# Altium PCB Flight_Controller - Final.PcbDoc
Units mil, origin at the board's own origin, x right, y up, seen from the top; angles counter-clockwise.
Board outline 3850 x 3210 mil, 2 copper layers (Top Layer, Bottom Layer); 58 components, 83 nets, 279 pads, 73 vias.
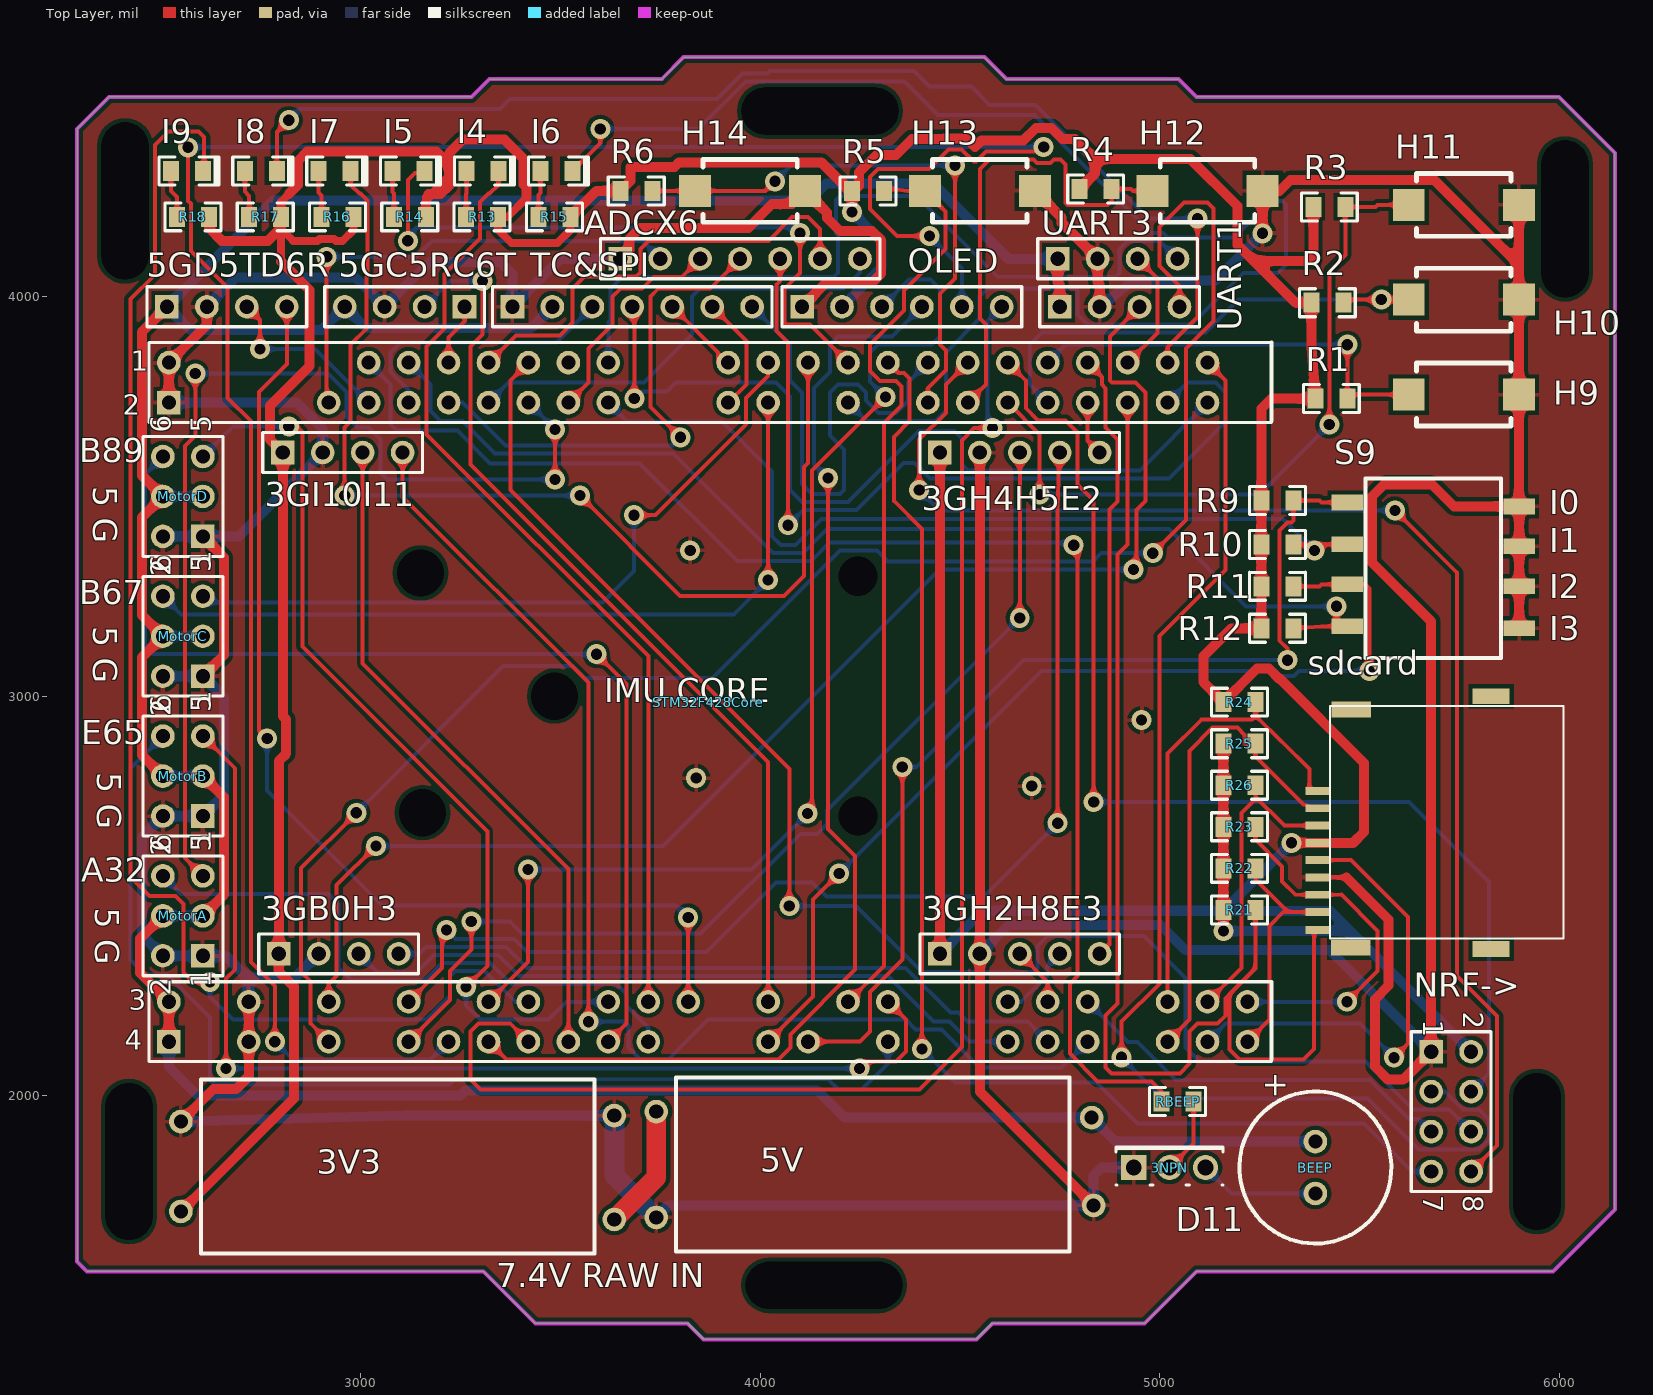
[diagram p0: Top Layer view]
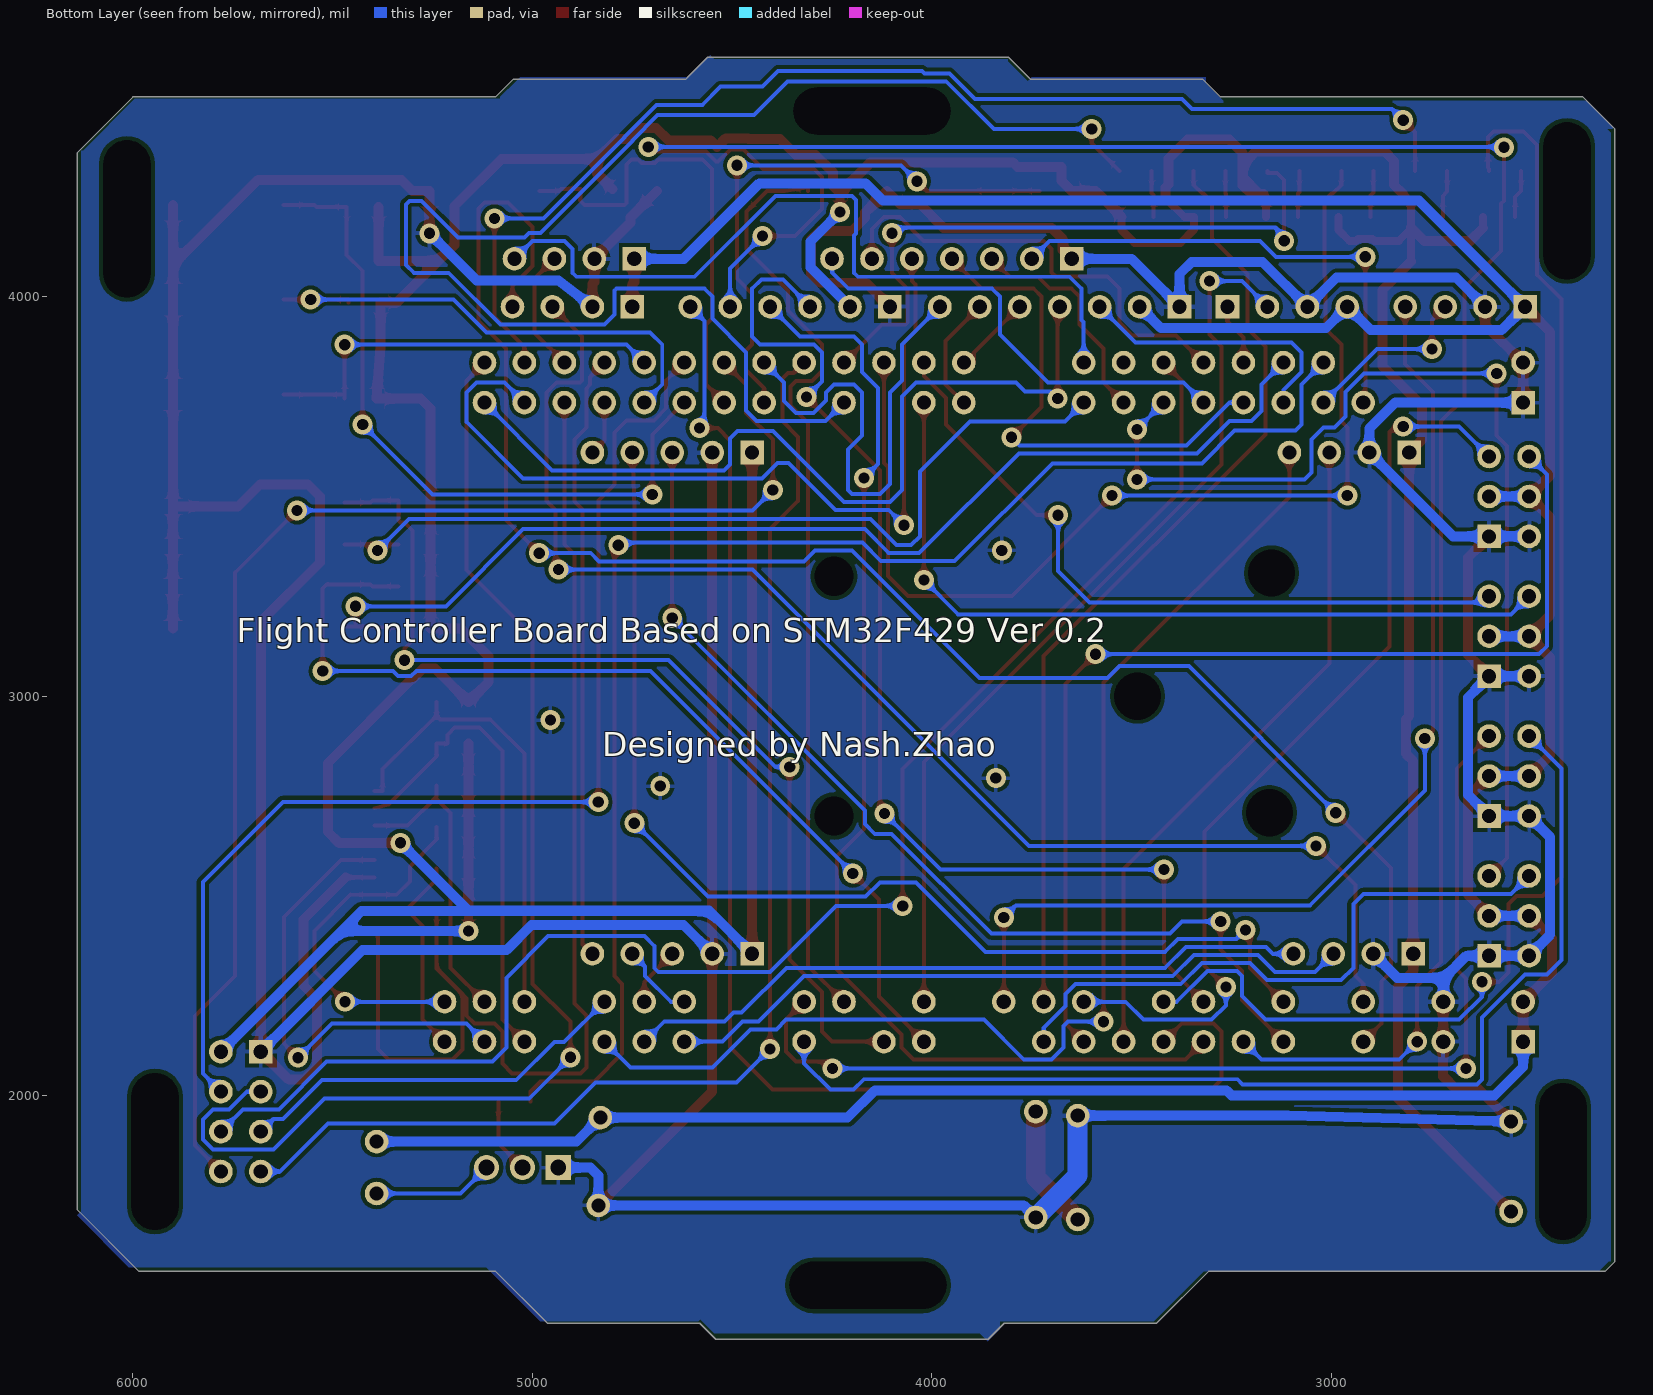
[diagram p1: Bottom Layer view, seen from below]

## Layer stack, top to bottom
Top Solder: solder mask 0.4, Solder Resist, Dk 3.5
Top Layer: signal copper 1.4
Dielectric 1: dielectric 12.6, FR-4, Dk 4.8
Bottom Layer: signal copper 1.4
Bottom Solder: solder mask 0.4, Solder Resist, Dk 3.5

## Board outline
2315,1560 3307.5,1560 3437.5,1430 3818.75,1430 3858.75,1390 4541.25,1390 4581.25,1430 4962.5,1430 5092.5,1560 5985,1560 6140,1715 6140,4360 6000,4500 5092.5,4500 5047.5,4545 4616.25,4545 4561.25,4600 3808.75,4600 3753.75,4545 3322.5,4545 3277.5,4500 2370,4500 2290,4420 2290,1585

## Design rules (kind name [scope] priority, off if disabled: settings)
Clearance [All] p1: gap=10
PolygonConnect [All] p1: connectstyle=Relief reliefconductorwidth=10 reliefentries=4 polygonreliefangle="90 Angle" airgapwidth=10
RoutingVias [All] p1: holewidth=28 width=50 viastyle="Through Hole" minholewidth=28 minwidth=50 maxholewidth=28 maxwidth=50
SMDNeckDown [All] p1: percent=50.000
SolderMaskExpansion [All] p1: expansion=4
Width Width_3 [InNet('VIN_RAW')] p1: maxlimit=50 minlimit=50 preferedwidth=50
Width Width_2 [InNet('3V3')] p2: maxlimit=25 minlimit=25 preferedwidth=25
Width Width_1 [InNet('GND')] p3: maxlimit=25 minlimit=25 preferedwidth=25
Width [InNet('5V')] p4: maxlimit=25 minlimit=25 preferedwidth=25
30 further rules are at their usual default settings.

## Components (designator, comment, footprint, x,y, rotation, side; value= is the part's Value field where it differs from the comment)
3GB0H3 "HDR1X4" HDR1X4 2930,2330 r0 top (schematic designator IIC-1)
3GH2H8E3 "HDR1X5" HDR1X5 4600,2460 r0 top (schematic designator MPU6050-2)
3GH4H5E2 "HDR1X5" HDR1X5 4600,3715 r0 top (schematic designator MPU6050-1)
3GI10I11 "HDR1X4" HDR1X4 2940,3585 r0 top (schematic designator IIC-2)
3NPN "NPN" 3NPN 5025,1820 r0 top
3V3 "AMS1117-3.3-Board" AMS1117-3.3-Board 3585,2040 r180 top
5GC5RC6T "HDR1X4" HDR1X4 3125,4000 r180 top (schematic designator BLE)
5GD5TD6R "HDR1X4" HDR1X4 2650,3950 r0 top (schematic designator UART2)
5V "AMS1117-5" "AMS1117-5-Board - duplicate" 3790,1610 r0 top
ADCX6 "HDR1X7" HDR1X7 3955,4220 r0 top
BEEP "BEEP-9.5X5.5" BUZZER 5390,1925 r270 top
H9 "SW-PB" Button 5756.57,3755 r180 top (schematic designator S1)
H10 "SW-PB" Button 5756.57,3992.5 r180 top (schematic designator S2)
H11 "SW-PB" Button 5756.57,4230 r180 top (schematic designator S3)
H12 "SW-PB" Button 5115,4265 r180 top (schematic designator S4)
H13 "SW-PB" Button 4545,4265 r180 top (schematic designator S5)
H14 "SW-PB" Button 3970,4265 r180 top (schematic designator S6)
I4 "LED0" 0805LED 3305,4310 r0 top (schematic designator D7)
I5 "LED0" 0805LED 3120,4310 r0 top (schematic designator D6)
I6 "LED0" 0805LED 3490,4310 r0 top (schematic designator D5)
I7 "LED0" 0805LED 2935,4310 r0 top (schematic designator D4)
I8 "LED0" 0805LED 2750,4310 r0 top (schematic designator D3)
I9 "LED0" 0805LED 2565,4310 r0 top (schematic designator D2)
MotorA "Header 3X2H" HDR2X3 2560,2450 r90 top
MotorB "Header 3X2H" HDR2X3 2560,2800 r90 top
MotorC "Header 3X2H" HDR2X3 2560,3150 r90 top
MotorD "Header 3X2H" HDR2X3 2560,3500 r90 top
NRF-> "HDR2X4" HDR2X4 5730,1960 r270 top (schematic designator NRF)
OLED "HDR1X6" HDR1X6 4105,3975 r0 top
R1 "Res2" 0805 5440,3745 r180 top
R2 "Res2" 0805 5430,3985 r180 top
R3 "Res2" 0805 5435,4225 r180 top
R4 "Res2" 0805 4850,4270 r180 top
R5 "Res2" 0805 4280,4265 r180 top
R6 "Res2" 0805 3700,4265 r180 top
R9 "Res2" 0805 5305,3490 r180 top
R10 "Res2" 0805 5305,3380 r180 top
R11 "Res2" 0805 5305,3275 r180 top
R12 "Res2" 0805 5305,3170 r180 top
R13 "470" 0805 3294,4200 r0 top
R14 "470" 0805 3113,4200 r0 top
R15 "470" 0805 3475,4200 r0 top
R16 "470" 0805 2932,4200 r0 top
R17 "470" 0805 2751,4200 r0 top
R18 "470" 0805 2570,4200 r0 top
R21 "10K" 0805 5210,2465 r180 top
R22 "10K" 0805 5210,2569 r180 top
R23 "10K" 0805 5210,2673 r180 top
R24 "10K" 0805 5190,2985 r0 top
R25 "10K" 0805 5190,2881 r0 top
R26 "10K" 0805 5190,2777 r0 top
RBEEP "Res2" 0805 5035,1985 r0 top
S9 "SW DIP-4" bmkgtp 5750,3260 r180 top
sdcard "SD_Card" SD_Card 5699.96,2974.65 r90 top
STM32F428Core "STM32F428Core" F429 2490,2125 r0 top
TC&SPI "HDR1X7" HDR1X7 3685,4100 r0 top
UART1 "HDR1X4" HDR1X4 4885,3950 r0 top
UART3 "HDR1X4" HDR1X4 4880,4070 r0 top

## Footprints (in the part's own frame and the unit in brackets; to place one, negate y for a bottom-side part, rotate by r counter-clockwise, add the part's x,y. Pads: shape width x height; smd on the part's side, far side on the other; paste and mask are expansions set on the pad)
3NPN [mm] "TO, Thru-Hole, Vertical, Heatsink Mounted; 3 In-Line Leads; Pitch 2.28 mm"
  round 1.6 hole 1: 1(0,0) 3(2.28,0)
  rect 1.6x1.6 hole 1: 2(-2.28,0)
  silkscreen extent -3.4,-1.1 3.4,1.3
0805 [mil] "0805"
  rect 40x50 smd: 1(-30,0) 2(50,0)
  silkscreen extent -60,-35 80,35
0805LED [mil] "0805LED"
  rect 40x50 smd: 1(-40,5) 2(40,5)
  silkscreen extent -70,-30 80,40
AMS1117-3.3-Board [mm] "AMS1117-3.3-Board"
  round 1.5 hole 0.9: GND(-1.27,2.286) GND(26.289,2.667) VIN+(-1.27,8.89) VOUT+(26.289,8.382)
  silkscreen extent 0,0 25.02,11.05
"AMS1117-5-Board - duplicate" [mm] "AMS1117-5-Board"
  round 1.5 hole 0.9: GND(-1.27,2.159) GND(26.543,2.921) VIN+(-1.27,8.89) VOUT+(26.416,8.509)
  silkscreen extent 0,0 25.02,11.05
bmkgtp [mm]
  rect 2x1 smd: 1(-3.81,2.286) 2(-3.81,-0.381) 3(-3.81,-2.921) 4(-3.81,-5.461) 5(7.112,-5.715) 6(7.112,-3.048) 7(7.112,-0.508) 8(7.112,2.159)
  silkscreen extent -2.67,-7.24 5.97,4.19
Button [mil] "Button"
  rect 80x80 smd: 1(-142.8,0) 2(132.79,0)
  silkscreen extent -123,-79 113,79
BUZZER [mm] "BUZZER"
  round 1.5 hole 0.9: 1(1.016,0) 2(4.318,0)
  silkscreen extent -2.16,-4.83 7.5,4.83
F429 [mm] "STM32F429Core"
  round 1.5 hole 0.9: 1(0.762,43.434) 6(13.462,43.434) 7(16.002,43.434) 8(18.542,43.434) 9(21.082,43.434) 10(23.622,43.434) 11(26.162,43.434) 12(28.702,43.434) 15(36.322,43.434) 16(38.862,43.434) 17(41.402,43.434) 18(43.942,43.434) 19(46.482,43.434) 20(49.022,43.434) 21(51.562,43.434) 22(54.102,43.434) 23(56.642,43.434) 24(59.182,43.434) 25(61.722,43.434) 26(64.262,43.434) 27(66.802,43.434) 33(10.922,40.894) 34(13.462,40.894) 35(16.002,40.894) 36(18.542,40.894) 37(21.082,40.894) 38(23.622,40.894) 39(26.162,40.894) 40(28.702,40.894) 43(36.322,40.894) 44(38.862,40.894) 46(43.942,40.894) 48(49.022,40.894) 49(51.562,40.894) 50(54.102,40.894) 51(56.642,40.894) 52(59.182,40.894) 53(61.722,40.894) 54(64.262,40.894) 55(66.802,40.894) 57(0.762,2.794) 59(5.842,2.794) 61(10.922,2.794) 63(16.002,2.794) 65(21.082,2.794) 66(23.622,2.794) 68(28.702,2.794) 69(31.242,2.794) 70(33.782,2.794) 72(38.862,2.794) 74(43.942,2.794) 75(46.482,2.794) 78(54.102,2.794) 79(56.642,2.794) 80(59.182,2.794) 82(64.262,2.794) 83(66.802,2.794) 84(69.342,2.794) 87(5.842,0.254) 89(10.922,0.254) 91(16.002,0.254) 92(18.542,0.254) 93(21.082,0.254) 94(23.622,0.254) 95(26.162,0.254) 96(28.702,0.254) 97(31.242,0.254) 100(38.862,0.254) 101(41.402,0.254) 103(46.482,0.254) 106(54.102,0.254) 107(56.642,0.254) 108(59.182,0.254) 110(64.262,0.254) 111(66.802,0.254) 112(69.342,0.254)
  rect 1.5x1.5 hole 0.9: 29(0.762,40.894) 85(0.762,0.254)
  silkscreen extent -0.51,-1.02 70.87,44.7
HDR1X4 [mm] "HDR1X4"
  rect 1.5x1.5 hole 0.9: 1(-3.429,0.635)
  round 1.5 hole 0.9: 2(-0.889,0.635) 3(1.651,0.635) 4(4.191,0.635)
  silkscreen extent -4.7,-0.64 5.46,1.91
HDR1X5 [mm] "HDR1X5"
  rect 1.5x1.5 hole 0.9: 1(-3.81,-2.667)
  round 1.5 hole 0.9: 2(-1.27,-2.667) 3(1.27,-2.667) 4(3.81,-2.667) 5(6.35,-2.667)
  silkscreen extent -5.08,-3.94 7.62,-1.4
HDR1X6 [mm] "Connector; Header; 6 Position"
  rect 1.5x1.5 hole 0.9: 1(0,0)
  round 1.5 hole 0.9: 2(2.54,0) 3(5.08,0) 4(7.62,0) 5(10.16,0) 6(12.7,0)
  silkscreen extent -1.27,-1.27 13.97,1.27
HDR1X7 [mm] "HDR1X7"
  rect 1.5x1.5 hole 0.9: 1(-7.747,-3.175)
  round 1.5 hole 0.9: 2(-5.207,-3.175) 3(-2.667,-3.175) 4(-0.127,-3.175) 5(2.413,-3.175) 6(4.953,-3.175) 7(7.493,-3.175)
  silkscreen extent -9.02,-4.44 8.76,-1.91
HDR2X3 [mm]
  rect 1.5x1.5 hole 0.9: 1(-2.54,-1.143)
  round 1.5 hole 0.9: 2(-2.54,1.397) 3(0,-1.143) 4(0,1.397) 5(2.54,-1.143) 6(2.54,1.397)
  silkscreen extent -3.81,-2.41 3.81,2.67
HDR2X4 [mm] "HDR2X4"
  rect 1.5x1.5 hole 0.9: 1(-3.81,-1.27)
  round 1.5 hole 0.9: 2(-3.81,1.27) 3(-1.27,-1.27) 4(-1.27,1.27) 5(1.27,-1.27) 6(1.27,1.27) 7(3.81,-1.27) 8(3.81,1.27)
  silkscreen extent -5.08,-2.54 5.08,2.54
SD_Card [mm] "SD_Card"
  rect 0.5x1.5 smd: 1(-5.381,7.747) 2(-6.481,7.747) 3(-7.581,7.747) 4(-8.681,7.747) 5(-9.781,7.747) 6(-10.881,7.747) 7(-11.981,7.747) 8(-13.081,7.747) 13(-14.224,7.747)
  rect 1x2.5 smd: 9(-15.356,5.622) 10(-0.206,5.597)
  rect 1x2.36 smd: 11(-15.431,-3.303) 12(0.644,-3.303)
  silkscreen extent -14.78,-7.9 0.02,6.94

## Part data
3NPN: library part 3NPN
H9 H10 H11 H12 H13 H14: "Switch"
I4 I5 I6 I7 I8 I9: "Typical INFRARED GaAs LED"
MotorA MotorB MotorC MotorD: "Header, 3-Pin, Dual row, Right Angle"
R1 R2 R3 R4 R5 R6 R9 R10 R11 R12 RBEEP: "Resistor"
R13 R14 R15 R16 R17 R18 R21 R22 R23 R24 R25 R26: library part res
S9: "DIP Switch, 4 Position, SPST"

## Free pads (board coordinates)
  round 60 hole 98.43: 1(4245,2699.92) 1(4245,3299.92)
  round 60 hole 118.11: 2(3150,3308.27) 3(3155,2708.27) 10(3485,3000)
  round 60 hole 118.11 slot 393.7 at 90 deg: 4(2410,4240) 5(2420,1835) 6(6015,4195) 7(5945,1860)
  round 60 hole 118.11 slot 393.7 at 0 deg: 8(4150,4465) 9(4160,1525)

## Via types
v1: diameter 50, hole 28, Top Layer to Bottom Layer, 73 vias

## Nets (pads, with @x,y where several pads share a name; then routed paths per layer and width w, separated by ;. In a path a pad name is that pad's centre, name@x,y a point inside that pad or via, vN(x,y) a via of type N, cw(c..) or ccw(c..) an arc to the next point about the centre after c; other vN are vias at no path point)
3V3: 3GB0H3.1 3GH2H8E3.1 3GH4H5E2.1 3GI10I11.1 3V3.VOUT+ NRF->.2 OLED.2 R1.2 R2.2 R3.2 R4.2 R5.2 R6.2 R9.2 R10.2 R11.2 R12.2 R13.2 R14.2 R15.2 R16.2 R17.2 R18.2 R21.2 R22.2 R23.2 R24.1 R25.1 R26.1 sdcard.4 | length 14298.7
  Top Layer w20: 2620,4172 R18.2 ; 2801,4088 2801,4170 ; 2820,4257 2801,4238 R17.2 2801,4173 2801,4170 ; R16.2 2982,4167 2955,4140 2938.64,4140 2933.64,4145 2896.36,4145 2891.36,4140 2831,4140 2801,4170 ; R14.2 3163,4240 ; 3170,4257 3163,4250 3163,4240 ; 3180,4257 3163,4240 ; 3415,4247 3368,4200 R13.2 3344,4168 3377,4135 3493,4135 3525,4167 R15.2 ; v1(4230,4212) R5.2 ; v1(5160,2412) R21.2
  Top Layer w25: 3V3.VOUT+ 2832.5,1992.5 2832.5,2273.44 2795,2310.94 3GB0H3.1 2795,2837.4 2813.6,2856 2813.6,2941.66 2805,2950.26 3GI10I11.1 2772.5,3642.5 2772.5,3726.5 2872,3826 2872,4017 2801,4088 ; 2620,4172 2652,4140 2768,4140 2801,4173 ; 2820,4257 2843,4280 2843,4340 2866,4363 3190,4363 3222,4331 ; 3170,4257 3180,4257 ; 3415,4247 3415,4273.18 3407.5,4280.68 3407.5,4345.5 3360,4393 3255,4393 3222,4360 3222,4331 ; R15.2 3590,4265 R6.2 3675,4290 3675,4325 3785.38,4325 3796.88,4336.5 4153.12,4336.5 4224.62,4265 R5.2 4235,4265 4247.5,4277.5 4247.5,4311.39 4291.11,4355 4340,4355 4380,4395 4458.54,4395 4460.04,4396.5 4515.96,4396.5 4537.79,4374.67 4554.62,4391.5 4659.32,4391.5 4690.32,4422.5 4729.68,4422.5 4757.18,4395 4788,4395 4838,4345 ; 3GH2H8E3.1 3GH4H5E2.1 ; R4.2 4838,4308 4838,4345 ; R21.2 R22.2 R23.2 R26.1 R25.1 ; v1(5330,2632.87) sdcard.4 5484.87,2632.87 5512,2660 5512,2833 5302.5,3042.5 5300.32,3042.5 5273.82,3069 5244,3069 R24.1 5110,3035 5110,3100 5180,3170 R12.2 R11.2 R10.2 R9.2 5255,3720 5280,3745 R1.2 5380,3875 R2.2 5340,3985 5235,4090 ; R3.2 5385,4090 5235,4090 ; 3180,4257 3222,4299 ; 3180,4257 3200,4257 3222,4279 3222,4299 ; 3222,4299 3222,4331 ; 3222,4299 3222.5,4299.5 3222.5,4330.5 3222,4331 ; 4838,4345 5077,4345 5195,4227 5195,4130 5235,4090
  Bottom Layer w25: OLED.2 4303.76,4073.76 4303.76,4138.24 v1(4230,4212) ; 3GH2H8E3.1 4557.03,2462.03 ; v1(5160,2412) 5478,2412 ; v1(5330,2632.87) 5160.13,2463 4558,2463 4557.03,2462.03 ; NRF->.2 5478,2412 ; 4557.03,2462.03 5427.97,2462.03 5478,2412
5V: 5GC5RC6T.4 5GD5TD6R.1 5V.VOUT+ BEEP.1 MotorA.3 MotorA.4 MotorB.3 MotorB.4 MotorC.3 MotorC.4 MotorD.3 MotorD.4 STM32F428Core.57 STM32F428Core.85 TC&SPI.2 UART1.1 UART3.1 | length 9109.7
  Top Layer w25: MotorA.4 2448,2393 2448,2307 STM32F428Core.57 STM32F428Core.85 ; MotorB.4 2452,2853 2452,3097 MotorC.4 2452,3203 2452,3447 MotorD.4 2452,3553 2452,3912 5GD5TD6R.1 ; MotorA.3 2658,2503 2658,2747 MotorB.3 ; UART3.1 4745,4037 4750,4032 UART1.1
  Bottom Layer w25: MotorA.4 MotorA.3 ; MotorB.4 MotorB.3 ; MotorC.4 MotorC.3 ; MotorD.4 MotorD.3 ; STM32F428Core.85 2520,2072 2591.5,2000.5 3249.56,2000.5 3262.06,2013 4143,2013 4211,1945 5V.VOUT+ 4890,1885 BEEP.1 ; TC&SPI.2 3427,3922 3013,3922 5GC5RC6T.4 2901.5,3916.5 2573.5,3916.5 5GD5TD6R.1 2781,4241 4123,4241 4166,4284 4432,4284 4621,4095 UART3.1
GND: 3GB0H3.2 3GH2H8E3.2 3GH4H5E2.2 3GI10I11.2 3NPN.2 3V3.GND 5GC5RC6T.3 5GD5TD6R.2 5V.GND ADCX6.1 H9.1 H10.1 H11.1 H12.1 H13.1 H14.1 MotorA.1 MotorA.2 MotorB.1 MotorB.2 MotorC.1 MotorC.2 MotorD.1 MotorD.2 NRF->.1 OLED.1 S9.1 S9.2 S9.3 S9.4 sdcard.6 STM32F428Core.1 STM32F428Core.29 STM32F428Core.59 STM32F428Core.87 TC&SPI.1 UART1.2 UART3.2 | length 17275.9
  Top Layer w9.84: sdcard.6 5468.06,2546.26
  Top Layer w19.68: S9.4@5899.37,3475 S9.4
  Top Layer w25: STM32F428Core.29 STM32F428Core.1 2615,3930 5GD5TD6R.2 ; 3V3.GND@2550,1935 2631.88,2016.88 2688.41,2016.88 2720,2048.47 STM32F428Core.87 STM32F428Core.59 ; MotorC.1 2658,3103 2658,3347 MotorD.1 ; ADCX6.1 3672.4,4117.4 3672.4,4144.81 3700,4172.4 3970.33,4172.4 4029.8,4231.87 4079.66,4231.87 H14.1 4167.5,4210.3 4167.5,4197 4200,4164.5 4280,4164.5 4303,4141.5 4303,4058 4280,4035 4165,4035 OLED.1 ; 3GH4H5E2.2 3GH2H8E3.2 4550,2010 5V.GND@4835,1725 ; H13.1 4755,4197.8 4755,4185 UART3.2 4845,4037 4850,4032 UART1.2 ; v1(5257.8,4158.8) H12.1 5300,4265 5327.5,4292.5 5687.5,4292.5 5899.37,4080.63 ; 5468.06,2546.26 5573.38,2440.94 5573.38,2275.38 5539,2241 5539,2073 5572,2040 5610,2040 NRF->.1 5680,3187 5532,3335 5532,3500 5562,3530 5682,3530 5737,3475 5899.37,3475 H9.1 H10.1 5899.37,4080.63 ; H11.1 5899.37,4080.63 ; S9.1 S9.2 S9.3 S9.4
  Bottom Layer w25: MotorC.2 MotorC.1 2658,2997 2658,2753 MotorB.1 MotorB.2 2452,2647 2452,2403 MotorA.2 MotorA.1 2662.03,2350 2717.03,2295 ; MotorD.2 MotorD.1 2695,3400 3GI10I11.2 2905,3670 2840,3735 STM32F428Core.29 ; 3V3.GND@2550,1935 3108,1950 3V3.GND@3635,1950 ; 5GD5TD6R.2 2688,4048 2987,4048 5GC5RC6T.3 3172.03,4087.03 3349.69,4087.03 3380,4056.72 TC&SPI.1 3500,4095 ADCX6.1 ; STM32F428Core.59 2717.03,2295 ; 3GB0H3.2 2835,2295 2717.03,2295 ; 5V.GND@3740,1695 3770,1725 4835,1725 4835,1800 4855,1820 3NPN.2 ; 3GH2H8E3.2 4622.03,2427.03 5002,2427.03 5064.53,2364.5 5425.5,2364.5 NRF->.1 ; UART1.2 4934.56,4040.5 5139.5,4040.5 v1(5257.8,4158.8)
  Bottom Layer w50: 3V3.GND@3635,1950 3635,1800 5V.GND@3740,1695
  other v1: 4680,2775 3840,2795 4955,2940 3825,3365
Net3NPN_1: 3NPN.1 RBEEP.2 | length 189.9
  Top Layer w10: 3NPN.1 5085,1880 RBEEP.2
Net3NPN_3: 3NPN.3 BEEP.2 | length 302.2
  Bottom Layer w10: 3NPN.3 5179.76,1755 BEEP.2
NetD2_1: I9.1 R18.1 | length 121.2
  Top Layer w10: I9.1 2525,4265 2540,4250 R18.1
NetD3_1: I8.1 R17.1 | length 119.6
  Top Layer w10: I8.1 2710,4263 2721,4252 R17.1
NetD4_1: I7.1 R16.1 | length 117.9
  Top Layer w10: I7.1 2895,4261 2902,4254 R16.1
NetD5_1: I6.1 R15.1 | length 117.1
  Top Layer w10: R15.1 3445,4255 3450,4260 I6.1
NetD6_1: I5.1 R14.1 | length 116.2
  Top Layer w10: I5.1 3080,4262 3083,4259 R14.1
NetD7_1: I4.1 R13.1 | length 115.4
  Top Layer w10: R13.1 3264,4257 3265,4258 I4.1
PA2: MotorA.5 STM32F428Core.38 | length 2602.7
  Top Layer w10: v1(2586,3808) 2586,3652 2560,3626 2560,2595 MotorA.5 ; v1(3486.77,3542.77) v1(3486.77,3668)
  Bottom Layer w10: v1(2586,3808) 2918.71,3808 2965.06,3761.65 2965.06,3700 2992.06,3673 3020,3673 3050,3643 3050,3560 3067.23,3542.77 v1(3486.77,3542.77) ; STM32F428Core.38 3486.77,3668.23 v1(3486.77,3668)
PA3: MotorA.6 STM32F428Core.97 | length 1554.1
  Bottom Layer w10: MotorA.6 2550,2505 2920,2505 2945,2480 2945,2320 2975.55,2289.45 3160.87,2289.45 3203.98,2332.56 3323.98,2332.56 3377.01,2279.53 3640,2279.53 3665,2254.53 3665,2224.53 3720,2169.53 STM32F428Core.97
PA5_SCK: NRF->.5 STM32F428Core.80 | length 994.6
  Bottom Layer w10: STM32F428Core.80 4920.47,2134.53 4945,2134.53 5040.53,2039 5527,2039 5624.44,1941.56 5648.44,1941.56 NRF->.5
PA6_MISO: NRF->.7 STM32F428Core.19 | length 3196.1
  Top Layer w10: STM32F428Core.19 4346,3809 4360,3809 4374,3795 4374,3688.36 4334.79,3649.15 4334.79,3489.21 4405,3419 v1(4405,2117)
  Bottom Layer w10: v1(4405,2117) 4489,2033 4842,2033 4945,1930 5512,1930 5632,1810 NRF->.7
PA7_MOSI: NRF->.6 STM32F428Core.10 | length 3817.4
  Top Layer w10: STM32F428Core.10 3375,3790 3375,3516 4073,2818 v1(4073,2475)
  Bottom Layer w10: v1(4073,2475) 4240,2475 4405,2310 4685,2310 4695,2320 4695,2374.53 4720,2399.53 4960.47,2399.53 5065,2295 5065,2120 5100,2085 5515,2085 5635,1965 5725,1965 NRF->.6
PA8_CS: STM32F428Core.20 TC&SPI.7 | length 1247.3
  Bottom Layer w10: TC&SPI.7 4075,3880 4075,3790 4105,3760 4105,3531 4130,3506 4200,3506 4210,3516 4210,3618 4175,3653 4175,3760 4195,3780 4245,3780 4265,3760 4265,3740 4296,3709 4340,3709 4370,3739 4370,3785 STM32F428Core.20
PA9_TX: STM32F428Core.61 UART1.3 | length 3395.7
  Top Layer w10: STM32F428Core.61 2920,2280 2940,2300 2940,2527 v1(3038,2625) ; v1(4935,3317.17) 4942.07,3324.24 4942.07,3465.57 4965,3488.5 4965,3760 4940,3785 4880.47,3785 4875.47,3790 4875.47,3900.47 UART1.3
  Bottom Layer w10: v1(3038,2625) 3757,2625 4448.71,3316.71 4934.54,3316.71 v1(4935,3317.17)
PA10_RX: STM32F428Core.89 UART1.4 | length 4282.9
  Top Layer w10: STM32F428Core.89 2875,2180 2875,2285.47 2850.47,2310 2850.47,2569.47 v1(2989,2708) ; v1(4983,3358) 5066,3441 5066,3870 5135,3939 5135,4221 5120,4236 5061,4236 5000,4175 5000,4077 5050,4027 UART1.4
  Bottom Layer w10: v1(2989,2708) 3356,3075 3530,3075 3560,3045 3880.86,3045 4200,3364.14 4292.86,3364.14 4320,3337 4833,3337 4854,3358 v1(4983,3358)
PB0_SCL: 3GB0H3.3 STM32F428Core.106 | length 1751.8
  Bottom Layer w10: 3GB0H3.3 3040.47,2309.53 3140.95,2309.53 3183.98,2352.56 3343.98,2352.56 3397.01,2299.53 4320,2299.53 4433.97,2185.56 4473.99,2185.56 4524.55,2135 STM32F428Core.106
PB5: R21.1 sdcard.13 STM32F428Core.53 | length 3166.9
  Top Layer w9.84: 5387,2117 5387,2414.65 sdcard.13
  Top Layer w10: STM32F428Core.53 4920,3380 4895,3355 4895,2230.83 4865,2200.83 4865,2070 4879.14,2055.86 5051.33,2055.86 5075.47,2080 5075.47,2160 5095.47,2180 5145,2180 5165,2200 5165,2242.97 5175,2252.97 ; R21.1 5240,2319.53 ; 5387,2117 5360,2090 5200,2090 5175,2115 5175,2252.97 ; 5175,2252.97 5240,2317.97 5240,2319.53 ; 5175,2252.97 5175,2254.53 5240,2319.53
PB6: MotorC.5 STM32F428Core.16 | length 1811.2
  Top Layer w10: v1(3684,3453) 3738,3453 3965,3680 3965,3747 4020,3802 STM32F428Core.16
  Bottom Layer w10: MotorC.5 2621,3234 3605,3234 3684,3313 v1(3684,3453)
PB7: MotorC.6 STM32F428Core.44 | length 2013.3
  Top Layer w10: v1(4020,3291) STM32F428Core.44
  Bottom Layer w10: MotorC.6 2550,3205 3934,3205 v1(4020,3291)
PB8: MotorD.5 STM32F428Core.68 | length 2324.2
  Top Layer w10: v1(2820,3675) 2840,3675 2854,3661 2854,3124 3317,2661 3317,2325 v1(3264,2272)
  Bottom Layer w10: MotorD.5 2680,3675 v1(2820,3675) ; v1(3264,2272) 3264,2226 3300,2190 3470,2190 3515,2235 STM32F428Core.68
PB9: MotorD.6 STM32F428Core.96 | length 2651.6
  Top Layer w10: v1(3590,3105) 3665,3030 3665,2180 STM32F428Core.96
  Bottom Layer w10: MotorD.6 2460,3555 2460,3125 2480,3105 v1(3590,3105)
PB10_TX: STM32F428Core.25 UART3.3 | length 311.4
  Top Layer w10: STM32F428Core.25 4994.53,3909.53 4994.53,4045.47 UART3.3
PB11_RX: STM32F428Core.12 UART3.4 | length 1991.6
  Bottom Layer w10: STM32F428Core.12 3620,3937 3625,3942 3625,4020 3655,4050 4185,4050 4195,4060 4195,4153 4190,4158 4190,4242 4200,4252 4392,4252 4594,4050 4890,4050 4900,4060 4900,4120 4920,4140 5000,4140 UART3.4
PB12_NSS: STM32F428Core.35 TC&SPI.3 | length 696.3
  Bottom Layer w10: STM32F428Core.35 3120,3766 3075,3811 3075,3860 3100,3885 3490,3885 TC&SPI.3
PB13_SCK: STM32F428Core.55 TC&SPI.4 | length 2170.3
  Top Layer w10: TC&SPI.4 3685,3975 v1(3685,3745)
  Bottom Layer w10: v1(3685,3745) 3703,3763 3767,3763 3789,3785 4040,3785 4075,3750 4075,3516 4105,3486 4220,3486 4398,3664 4486.47,3664 4505.47,3645 4505.47,3580 4520,3565.47 4950.47,3565.47 STM32F428Core.55
PB14_MISO: STM32F428Core.15 TC&SPI.5 | length 212.6
  Top Layer w10: TC&SPI.5 3895,3860 3895,3835 STM32F428Core.15
PB15_MOSI: STM32F428Core.43 TC&SPI.6 | length 294.4
  Top Layer w10: TC&SPI.6 3965.66,3889.34 3965.66,3780.66 STM32F428Core.43
PC0: ADCX6.2 STM32F428Core.33 | length 1235.5
  Top Layer w10: v1(2915,4100) 2915,3772 STM32F428Core.33
  Bottom Layer w10: v1(2915,4100) 3138,4100 3178,4140 3705,4140 ADCX6.2
PC1: ADCX6.3 STM32F428Core.39 | length 569.9
  Top Layer w10: STM32F428Core.39 3570,3785 3570,3870 3630,3930 3630,4000 3650,4020 3704.06,4020 3734.06,4050 3805,4050 ADCX6.3
PC2: ADCX6.4 STM32F428Core.36 | length 1281.4
  Top Layer w10: v1(3801,3648) 3725,3724 3725,4000 3745,4020 3875,4020 ADCX6.4
  Bottom Layer w10: STM32F428Core.36 3255.47,3735 3362.47,3628 3781,3628 v1(3801,3648)
PC3: ADCX6.5 STM32F428Core.54 | length 2166.3
  Top Layer w10: ADCX6.5 4050,4039.53 4040.47,4030 4040.47,3914.53 4070,3885 v1(4070,3428)
  Bottom Layer w10: v1(4070,3428) 4108,3466 4241,3466 4358.88,3583.88 4387.07,3583.88 4425.47,3545.47 5023.47,3545.47 5165,3687 5165,3760 5140,3785 5070,3785 STM32F428Core.54
PC4: ADCX6.6 STM32F428Core.9 | length 1152.6
  Top Layer w10: STM32F428Core.9 3388.44,3903.44 3498.44,3903.44 3530,3935 3530,4020.47 3560,4050.47 3689.47,4050.47 3700,4061 3700,4120 3720,4140 4020.47,4140 4080,4199.53 4120,4199.53 4150,4169.53 ADCX6.6
PC5: ADCX6.7 STM32F428Core.37 | length 1154.7
  Bottom Layer w10: STM32F428Core.37 3370,3785 3709,3785 3829,3905 3829,4000 3849,4020 4209,4020 4250,4061 ADCX6.7
PC6_TX: 5GC5RC6T.1 STM32F428Core.8 | length 156.6
  Top Layer w10: STM32F428Core.8 3220,3897.5 3260,3937.5 5GC5RC6T.1
PC7_RX: 5GC5RC6T.2 STM32F428Core.72 | length 2296.5
  Top Layer w10: v1(3305,4039) 3305,3905 3275,3875 3275,3580 4020,2835 STM32F428Core.72
  Bottom Layer w10: 5GC5RC6T.2 3224,4039 v1(3305,4039)
PC8: R23.1 sdcard.7 STM32F428Core.84 | length 912.9
  Top Layer w9.84: 5307,2535.95 5340,2502.95 sdcard.7 5455,2502.95
  Top Layer w10: R23.1 5240,2641 5307,2574 5307,2535.95 ; 5455,2502.95 5545.88,2412.07 5545.88,2311.88 v1(5469,2235)
  Bottom Layer w10: STM32F428Core.84 v1(5469,2235)
PC9: R22.1 sdcard.8 STM32F428Core.112 | length 590.1
  Top Layer w9.84: 5240,2541 5321.35,2459.65 ; 5309.65,2459.65 5321.35,2459.65 ; sdcard.8 5321.35,2459.65
  Top Layer w10: STM32F428Core.112 5275,2190 5275,2425 5309.65,2459.65 ; 5240,2541 R22.1
PC10: R24.2 sdcard.1 STM32F428Core.82 | length 1179
  Top Layer w9.84: R24.2 5240,2951 5375,2818 5375,2762.8 sdcard.1
  Top Layer w10: STM32F428Core.82 5020,2856 5105,2941 5230,2941 5240,2951
PC11: R25.2 sdcard.2 STM32F428Core.110 | length 1207.3
  Top Layer w9.84: 5240,2849 5360.54,2728.46 sdcard.2
  Top Layer w10: STM32F428Core.110 5075,2190 5075,2863 5133,2921 5195,2921 5213,2903 5213,2881 R25.2 5240,2849
PC12: sdcard.5 STM32F428Core.111 | length 1173.3
  Top Layer w9.84: sdcard.5 5479.16,2589.57
  Top Layer w10: 5479.16,2589.57 5622,2446.73 5622,2130 v1(5587,2095)
  Bottom Layer w10: STM32F428Core.111 5165,2180 5502,2180 v1(5587,2095)
PD2: R26.2 sdcard.3 STM32F428Core.83 | length 775
  Top Layer w9.84: R26.2 5240,2748.18 5242.59,2745.59 5275.18,2713 5276,2713 5312.82,2676.18 sdcard.3
  Top Layer w10: STM32F428Core.83 5205,2320 5205,2708 5242.59,2745.59
PD4_D0: OLED.3 STM32F428Core.65 | length 2875.2
  Top Layer w10: STM32F428Core.65 3419,2334 v1(3419,2566) ; v1(4119,2706) 4130,2717 4130,3565 v1(4314,3749)
  Bottom Layer w10: v1(3419,2566) 3979,2566 v1(4119,2706) ; OLED.3 4373,4043 4427,4043 4450,4020 4450,3900 4430,3880 4295,3880 4275,3860 4275,3788 v1(4314,3749)
PD5_TX: 5GD5TD6R.3 STM32F428Core.34 | length 447.2
  Top Layer w10: 5GD5TD6R.3 2748,3942 v1(2748,3869)
  Bottom Layer w10: v1(2748,3869) 2886,3869 STM32F428Core.34
PD6_RX: 5GD5TD6R.4 STM32F428Core.70 | length 2645.4
  Top Layer w10: v1(2766,2894) 2745,2915 2745,3761 2815,3831 5GD5TD6R.4 ; STM32F428Core.70 v1(3820,2446)
  Bottom Layer w10: v1(2766,2894) 2766,2764 3054,2476 3790,2476 v1(3820,2446)
PD7_D1: OLED.4 STM32F428Core.93 | length 2942.4
  Top Layer w10: STM32F428Core.93 3365,2090 4045.47,2090 4075.47,2120 4075.47,2153.44 4238,2315.97 4238,2600 4170,2668 v1(4170,3546)
  Bottom Layer w10: v1(4170,3546) 4135,3581 4135,3771 4175,3811 4175,3880 4195,3900 4330,3900 OLED.4
PD11: RBEEP.1 STM32F428Core.6 | length 3630.5
  Top Layer w10: v1(4785,3378) 4795,3368 4795,2299.06 4775.47,2279.53 4775.47,2105.39 4845,2035.86 4980,2035.86 5005,2010.86 RBEEP.1
  Bottom Layer w10: STM32F428Core.6 3075,3780 3075,3680 3090,3665 3242,3665 3324,3583 3698,3583 3943,3338 4128,3338 4174.14,3384.14 4778.86,3384.14 v1(4785,3378)
PD13_RES: OLED.5 STM32F428Core.92 | length 5905.6
  Top Layer w10: v1(2568,4374) 2568,4240 2575,4233 2575,4115 2667,4023 2667,3747 2725,3689 2725,2335 2785,2275 v1(2785,2135) ; v1(4424,4152) 4343,4152 4275,4220 4275,4300 4295,4320 4422.43,4320 4471.43,4369 4504.57,4369 4535.5,4338.07 4540.08,4338.07 4566.01,4364 4692.72,4364 4695.86,4360.86 v1(4710,4375)
  Bottom Layer w10: v1(2568,4374) 2569,4375 v1(4710,4375) ; v1(2785,2135) 2830,2090 3175,2090 STM32F428Core.92 ; v1(4424,4152) 4505,4071 OLED.5
PE2_INT: 3GH4H5E2.5 STM32F428Core.52 | length 137.4
  Top Layer w10: STM32F428Core.52 4820,3640 3GH4H5E2.5
PE3_INT: 3GH2H8E3.5 STM32F428Core.24 | length 1529.7
  Top Layer w10: STM32F428Core.24 4855.47,3799.53 4855.47,3780 4865,3770.47 4865,3673 4895,3643 4895,3486.88 4875,3466.88 4875,2380 3GH2H8E3.5
PE5: MotorB.5 STM32F428Core.75 | length 2738.1
  Top Layer w10: MotorB.5 2686,2819 2686,2316 2663,2293 v1(2663,2068) ; v1(4249,2068) 4266,2085 4340,2085 4365,2110 4365,2190 STM32F428Core.75
  Bottom Layer w10: v1(2663,2068) v1(4249,2068)
PE6: MotorB.6 STM32F428Core.103 | length 2808.1
  Bottom Layer w10: MotorB.6 2424,2819 2424,2339 2460,2303 2515.7,2303 2623,2195.7 2623,2040 2635,2028 3222.06,2028 3235.06,2041 4170,2041 4196,2015 4254,2015 4320,2081 STM32F428Core.103
PF10_DC: OLED.6 STM32F428Core.94 | length 3509.1
  Top Layer w10: STM32F428Core.94 3374.47,2180.53 3295.53,2180.53 3275,2160 3275,2040 3300,2015 4398.68,2015 4505,2121.32 4505,3640 4536,3671 v1(4582,3671)
  Bottom Layer w10: v1(4582,3671) 4569.53,3683.47 4569.53,3939.53 OLED.6
PG2_IRQ: NRF->.8 STM32F428Core.21 | length 3369.5
  Top Layer w10: v1(4398.2,3515.8) 4398.2,3642.2 4465,3709 4465,3780 STM32F428Core.21 ; v1(5589,3465) 5745,3309 5745,2299 5845,2199 5845,1875 NRF->.8
  Bottom Layer w10: v1(4398.2,3515.8) 4449,3465 v1(5589,3465)
PG3_CS: NRF->.4 STM32F428Core.22 | length 2846
  Top Layer w10: STM32F428Core.22 4665,3790 4665,3721 4696,3690 4765,3690 4795,3660 4795,3530 4835,3490 v1(4835,2735)
  Bottom Layer w10: v1(4835,2735) 5625,2735 5825,2535 5825,2055 NRF->.4
PG9_CE: NRF->.3 STM32F428Core.27 | length 3115.4
  Top Layer w10: v1(4905,2096) 4905,2185 5000,2280 5000,3151 5165,3316 5165,3790 STM32F428Core.27
  Bottom Layer w10: v1(4905,2096) 5008,1993 5520,1993 5648,1865 5800,1865 5825,1890 5825,1940 5800,1965 5760,1965 5715,2010 NRF->.3
PH2_SCL: 3GH2H8E3.3 STM32F428Core.79 | length 149
  Top Layer w10: 3GH2H8E3.3 4720,2285 STM32F428Core.79
PH3_SDA: 3GB0H3.4 STM32F428Core.107 | length 1730.7
  Bottom Layer w10: 3GB0H3.4 3146.42,2355 3163.98,2372.56 3363.98,2372.56 3417.01,2319.53 4364.53,2319.53 4476.26,2207.8 4496.23,2207.8 4519.02,2185 4670,2185 STM32F428Core.107
PH4_SCL: 3GH4H5E2.3 STM32F428Core.91 | length 2512.3
  Top Layer w10: STM32F428Core.91 3223.98,2238.98 3223.98,2312.56 3277,2365.58 v1(3277,2436) ; v1(4650,3196) 3GH4H5E2.3
  Bottom Layer w10: v1(3277,2436) 3373.98,2436 3403.98,2406 3851.33,2406 4100.87,2655.55 4143,2655.55 4167.46,2680 4167.46,2713.46 v1(4650,3196)
PH5_SDA: 3GH4H5E2.4 STM32F428Core.63 | length 2863.8
  Top Layer w10: STM32F428Core.63 3203.98,2318.98 3203.98,2403.98 v1(3215,2415) ; v1(4745,2682) 4745,3473 3GH4H5E2.4
  Bottom Layer w10: v1(3215,2415) 3237.44,2392.56 3383.98,2392.56 3417.01,2359.53 3865.53,2359.53 4040,2534 4130,2534 4166,2498 4561,2498 v1(4745,2682)
PH8_SDA: 3GH2H8E3.4 STM32F428Core.78 | length 193.4
  Bottom Layer w10: STM32F428Core.78 4653.44,2235 4718.44,2300 4718.44,2323.44 3GH2H8E3.4
PH9: H9.2 R1.1 STM32F428Core.23 | length 1057.4
  Top Layer w10: R1.1 R1.1@5470,3755 ; v1(5470,3880) R1.1@5470,3755 ; H9.2 R1.1@5470,3755
  Bottom Layer w10: STM32F428Core.23 4765,3880 v1(5470,3880)
PH10: H10.2 R2.1 STM32F428Core.51 | length 1331
  Top Layer w10: R2.1 5460,3992.5 H10.2 5623.78,3993 v1(5555,3993)
  Bottom Layer w10: STM32F428Core.51 4675,3780 4675,3880 4705.47,3910.47 5114.53,3910.47 5197.06,3993 v1(5555,3993)
PH11: H11.2 R3.1 STM32F428Core.50 | length 1783
  Top Layer w10: STM32F428Core.50 4700,3655 v1(4700,3505) ; v1(5425,3680) 5425,4065 5465,4105 R3.1 5541,4225 5546,4230 H11.2
  Bottom Layer w10: v1(4700,3505) 5250,3505 v1(5425,3680)
PH12: H12.2 R4.1 STM32F428Core.49 | length 1198.9
  Top Layer w10: STM32F428Core.49 4565,3780 4565,3930 4550,3945 4550,4319.7 4574.3,4344 4684.43,4344 4693.43,4335 4726.57,4335 4735.57,4344 4752,4344 4765,4331 4765,4235 4770,4230 4870,4230 4880,4240 R4.1 4928,4270 4933,4265 H12.2
PH13: H13.2 R5.1 STM32F428Core.74 | length 2352.1
  Top Layer w10: STM32F428Core.74 4310,2325 4310,3684.21 4354,3728.21 4354,3775 4340,3789 4300.15,3789 4275,3814.15 4275,3880 4360,3965 4360,4015 4464,4119 4464,4213.2 H13.2 4369,4265 4311.07,4272.86 4310,4273 R5.1
PH14: H14.2 R6.1 STM32F428Core.48 | length 1419.1
  Top Layer w10: R6.1 H14.2 4013,4265 v1(4037,4289) ; STM32F428Core.48 4420,3771 4465,3816 4465,3865 4450,3880 4450,4007.44 4488,4045.44 v1(4488,4329)
  Bottom Layer w10: v1(4037,4289) 4077,4329 v1(4488,4329)
PI0: R9.1 S9.5 STM32F428Core.101 | length 2502.2
  Top Layer w10: STM32F428Core.101 4250,2135 4275,2160 4275,2260 4356,2341 v1(4356,2823) ; v1(5320,3090) 5320,3118.79 5300,3138.79 5300,3415 5320,3435 5330,3435 5335,3440 R9.1 5400,3490 5405,3485 S9.5
  Bottom Layer w10: v1(4356,2823) 4392,2823 4659,3090 v1(5320,3090)
PI1: R10.1 S9.6 STM32F428Core.40 | length 2227.6
  Top Layer w10: R10.1 5402,3380 v1@5403,3380 ; v1(5388,3365) v1@5403,3380 ; S9.6 v1@5403,3380
  Bottom Layer w10: STM32F428Core.40 3667,3688 3905,3688 4030,3563 4030,3400 4052,3378 4088,3378 4154,3444 5309,3444 v1(5388,3365)
PI2: R11.1 S9.7 STM32F428Core.100 | length 2445.7
  Top Layer w10: STM32F428Core.100 4132.65,2247.65 4132.65,2490.65 v1(4198,2556) ; R11.1 5400,3275 5405,3280 S9.7 5515,3280 5525,3270 v1(5525,3063)
  Bottom Layer w10: v1(4198,2556) 4705,3063 5290.43,3063 5303.43,3050 5336.57,3050 5349.57,3063 v1(5525,3063)
PI3: R12.1 S9.8 STM32F428Core.7 | length 2849.2
  Top Layer w10: R12.1 5405,3175 S9.8@5443,3175 ; v1(5443,3225) S9.8@5443,3175 ; S9.8 S9.8@5443,3175
  Bottom Layer w10: STM32F428Core.7 3175,3780 3175,3714 3200,3689 3255.47,3689 3336.47,3608 3782,3608 4032,3358 4108,3358 4168,3418 5023.28,3418 5216.28,3225 v1(5443,3225)
PI4: I4.2 STM32F428Core.69 | length 2386.2
  Top Layer w10: I4.2 3345,4280 3323,4258 3320,4258 3299,4237 3299,4146 3210,4057 3210,3920 3165,3875 3165,3655 3720,3100 STM32F428Core.69
PI5: I5.2 STM32F428Core.18 | length 1655.7
  Top Layer w10: v1(3118,4140) 3118,4292 3136,4310 3160,4310 I5.2 ; v1(4100,4159) 4100,4059.53 4060.47,4020 4060.47,3935 4065.47,3930 4125,3930 STM32F428Core.18
  Bottom Layer w10: v1(3118,4140) 3118,4151 3140,4173 4086,4173 v1(4100,4159)
PI6: I6.2 STM32F428Core.46 | length 3760.3
  Top Layer w10: I6.2 3600,4385 v1(3600,4420)
  Bottom Layer w10: v1(3600,4420) 3845,4420 3964.06,4539.06 4360.94,4539.06 4445,4455 4686.57,4455 4750,4391.57 4750,4390 4980,4160 5008.28,4160 5020.28,4148 5186,4148 5278,4240 5308,4240 5317,4231 5317,4080 5297,4060 5209.53,4060 5080,3930.47 4820,3930.47 4795,3955.47 4795,4015 4790,4020 4569.53,4020 4549.53,4000 4549.53,3945 4465,3860.47 4465,3715.47 4438.53,3689 4266,3689 STM32F428Core.46
PI7: I7.2 STM32F428Core.17 | length 2668.6
  Top Layer w10: v1(2960,3502) 2960,3673 2975,3688 2975,3880 3014,3919 3014,4049 3017,4052 3017,4241 3000,4258 2997,4258 2975,4280 I7.2 ; v1(3549,3502) 3800,3251 4060,3251 4110,3301 4110,3574 4120,3584 STM32F428Core.17
  Bottom Layer w10: v1(2960,3502) v1(3549,3502)
PI8: I8.2 STM32F428Core.26 | length 3011.2
  Top Layer w10: I8.2 2790,4412 v1(2820,4442) ; STM32F428Core.26 5020,3873.72 5095,3948.72 v1(5095,4196)
  Bottom Layer w10: v1(2820,4442) 2848,4470 3348.5,4470 3373.5,4495 3891.72,4495 3955.77,4559.06 4018.56,4559.06 4024.5,4565 4385,4565 4424.14,4525.86 4529.14,4525.86 4574.86,4480.14 4689.71,4480.14 4770,4399.85 4770,4398.28 4972.28,4196 v1(5095,4196)
PI9: I9.2 STM32F428Core.66 | length 3465.8
  Top Layer w10: I9.2 2605,4320 2608,4323 2608,4400 2594,4414 2519,4414 2485,4380 2485,4055 2424,3994 2424,2547 2471,2500 2537,2500 2557,2480 2557,2308 2580,2285 v1(2623,2285)
  Bottom Layer w10: v1(2623,2285) 2623,2247.47 2680,2190.47 3164.53,2190.47 3223.98,2249.92 3223.98,2300 3236.54,2312.56 3310.44,2312.56 3388,2235 STM32F428Core.66
PI10_SCL: 3GI10I11.3 STM32F428Core.95 | length 1688.3
  Top Layer w10: 3GI10I11.3 3005,3082 3520,2567 STM32F428Core.95
PI11_SDA: 3GI10I11.4 STM32F428Core.108 | length 3057
  Top Layer w10: 3GI10I11.4 3105,3499 3570,3034 v1(3570,2185)
  Bottom Layer w10: v1(3570,2185) 3659.53,2185 3670,2174.53 3670,2120 3700,2090 3770,2090 3870,2190 4365,2190 4389.44,2165.56 4453.98,2165.56 4549.54,2070 4755,2070 STM32F428Core.108
VIN_RAW: 3V3.VIN+ 5V.VIN+ | length 313.5
  Top Layer w50: 3V3.VIN+ 3740,1795 5V.VIN+
pads on no net: sdcard.9 sdcard.10 sdcard.11 sdcard.12 STM32F428Core.11

## Polygon pours and split planes (outlines as drawn)
GND on Top Layer "Keep-Out Layer-No Net" (solid, remove dead copper, pour order 10): 2370,4500 3270,4500 3315,4545 3322.5,4545 3753.75,4545 3808.75,4600 4561.25,4600 4616.25,4545 5047.5,4545 5092.5,4500 6000,4500 6140,4360 6140,1715 5985,1560 5092.5,1560 4962.5,1430 4955,1430 4581.25,1430 4571.25,1420 4551.25,1400 4535,1400 3868.75,1400 3858.75,1390 3818.75,1430 3437.5,1430 3307.5,1560 2315,1560 2290,1585 2290,4420
GND on Bottom Layer "Keep-Out Layer-No Net" (solid, remove dead copper, pour order 12): 2290,4420 2360,4490 2370,4490 3270,4490 3275,4495 3315,4535 3315,4550 3750,4550 3760,4540 3810,4590 3810,4595 4545,4595 4555,4605 4610,4550 4615,4550 5030,4550 5040,4540 5080,4500 5080,4495 5995,4495 6125,4365 6130,4365 6130,1710 6140,1700 6010,1570 5995,1570 5115,1570 5095,1550 4980,1435 4945,1435 4585,1435 4580,1440 4545,1405 4540,1405 3880,1405 3860,1385 3830,1415 3830,1435 3445,1435 3435,1445 3320,1560 3310,1560 2330,1560 2305,1585 2300,1585 2300,4410 2310,4420

## Keep-outs
Top Layer:
  lines w10: 2290,1585 2290,4420 2370,4500 3277.5,4500 3322.5,4545 3753.75,4545 3808.75,4600 4561.25,4600 4616.25,4545 5047.5,4545 5092.5,4500 6000,4500 6140,4360 6140,1715 5985,1560 5092.5,1560 4962.5,1430 4581.25,1430 4541.25,1390 3858.75,1390 3818.75,1430 3437.5,1430 3307.5,1560 2415,1560 2315,1560 2290,1585

## Silkscreen, mask and mechanical layers (free items; w line width, h text height)
Top Overlay:
  text "B89" at 2295,3585 h60
  text "5 G" at 2330,3525 h60 r270
  text "I0" at 5975,3455 h60
  text "I1" at 5975,3360 h60
  text "I2" at 5975,3245 h60
  text "B67" at 2295,3230 h60
  text "5 G" at 2330,3175 h60 r270
  text "I3" at 5975,3140 h60
  text "IMU CORE" at 3610,2985 h60
  text "E65" at 2300,2880 h60
  text "5 G" at 2340,2810 h60 r270
  text "A32" at 2300,2535 h60
  text "5 G" at 2335,2470 h60 r270
  text "D11" at 5040,1660 h60
  text "7.4V RAW IN" at 3340,1520 h60
Bottom Overlay:
  text "Flight Controller Board Based on STM32F429 Ver 0.2" at 5740,3135 h60
  text "Designed by Nash.Zhao" at 4825,2850 h60

## Text inside footprints (layer, text, board x,y; h text height)
BEEP: Top Overlay "+" at 5264,2060 h59.06 r270
MotorA: Top Overlay "1" at 2625,2270 h50 r90; Top Overlay "2" at 2525,2250 h50 r90; Top Overlay "5" at 2625,2610 h50 r90; Top Overlay "6" at 2525,2610 h50 r90
MotorB: Top Overlay "1" at 2625,2620 h50 r90; Top Overlay "2" at 2525,2600 h50 r90; Top Overlay "5" at 2625,2960 h50 r90; Top Overlay "6" at 2525,2960 h50 r90
MotorC: Top Overlay "1" at 2625,2970 h50 r90; Top Overlay "2" at 2525,2950 h50 r90; Top Overlay "5" at 2625,3310 h50 r90; Top Overlay "6" at 2525,3310 h50 r90
MotorD: Top Overlay "1" at 2625,3320 h50 r90; Top Overlay "2" at 2525,3300 h50 r90; Top Overlay "5" at 2625,3660 h50 r90; Top Overlay "6" at 2525,3660 h50 r90
NRF->: Top Overlay "2" at 5760,2210 h50 r270; Top Overlay "1" at 5660,2190 h50 r270; Top Overlay "7" at 5660,1750 h50 r270; Top Overlay "8" at 5760,1750 h50 r270
STM32F428Core: Top Overlay "1" at 2425,3815 h50; Top Overlay "4" at 2410,2115 h50; Top Overlay "3" at 2420,2215 h50; Top Overlay "2" at 2405,3705 h50